# EAGLE board uarm_esp32_layout (EAGLE 7.6.0)

No outline drawn. Coordinates in mm, seen from the top.
Copper layers (1*16): Top 0.035mm / dielectric 1.5mm / Bottom 0.035mm
Design rules "default": minimum track width 10mil, minimum drill 24mil, track to track 8mil, track to pad 8mil, pad to pad 8mil, via to via 8mil, smd to smd 8mil, copper to edge 40mil, drill to drill 8mil, minimum pad ring 10mil, minimum via ring 8mil, stop-mask expansion 4mil, vias tented up to drill 0mil, thermal gap 10mil

## Footprints (pad centres in the part's own frame; a part is rotated, then mirrored left to right if it is on the bottom)
UARM_ALIGNMENT_BASE = hole 2.794: 0,0; 9.779,0; 19.558,0; 29.337,0; 39.116,0; 48.895,0; 68.453,0; 78.232,0; 88.011,0; 97.79,0; 107.569,0; 117.348,0; 58.674,0

## Placement (x,y rotation side)
E$1  [UARM]  0,0 100 top
E$2  [ACTOBOTICS_CHANNEL_SINGLE_DRILL_REF]  -266.7,127 90 top
E$3  [CARTRIDGE_ESP32]  -172.72,166.37 90 top
E$4  [ACTOBOTICS_CHANNEL_SINGLE_DRILL_REF]  304.8,127 90 top
E$5  [ACTOBOTICS_CHANNEL_SINGLE_DRILL_REF]  19.05,127 90 top
E$6  [ACTOBOTICS_CHANNEL_6"]  -152.4,127 90 top
E$7  [UARM_ALIGNMENT_BASE]  -170.18,146.05 180 top
E$8  [CARTRIDGE_ESP32]  -20.32,166.37 90 top
E$9  [ACTOBOTICS_CHANNEL_6"]  0,127 90 top
E$10  [UARM_ALIGNMENT_BASE]  -17.78,146.05 180 top
E$11  [CARTRIDGE_ESP32]  132.08,166.37 90 top
E$12  [ACTOBOTICS_CHANNEL_6"]  152.4,127 90 top
E$13  [UARM_ALIGNMENT_BASE]  134.62,146.05 180 top
E$14  [CARTRIDGE_ESP32]  284.48,166.37 90 top
E$15  [ACTOBOTICS_CHANNEL_6"]  304.8,127 90 top
E$16  [UARM_ALIGNMENT_BASE]  287.02,146.05 180 top
E$17  [CARTRIDGE_ESP32]  -166.37,68.58 180 top
E$18  [ACTOBOTICS_CHANNEL_6"]  -127,88.9 180 top
E$19  [UARM_ALIGNMENT_BASE]  -146.05,71.12 270 top
E$20  [ACTOBOTICS_CHANNEL_SINGLE_DRILL_REF]  171.45,127 90 top
E$21  [ACTOBOTICS_CHANNEL_SINGLE_DRILL_REF]  -127,88.9 180 top
E$22  [ACTOBOTICS_CHANNEL_SINGLE_DRILL_REF]  -127,-25.4 180 top
E$23  [ACTOBOTICS_CHANNEL_SINGLE_DRILL_REF]  -133.35,127 90 top
E$25  [LASER_CUTTER_MAX_SIZE]  -304.8,-292.1 0 top

## Library data of the parts
E$1 = sandbox
E$2 E$4-E$6 E$9 E$12 E$15 E$18 E$20-E$23 = SparkFun-Hardware
E$3 E$7 E$8 E$10 E$11 E$13 E$14 E$16 E$17 E$19 E$25 = uarm_alignment_base